# Altium PCB BMI088_CORE_V1.PcbDoc
Units mil, origin at the board's own origin, x right, y up, seen from the top; angles counter-clockwise.
Board outline 748.03 x 748.03 mil, 2 copper layers (Top Layer, Bottom Layer); 14 components, 18 nets, 67 pads, 34 vias.
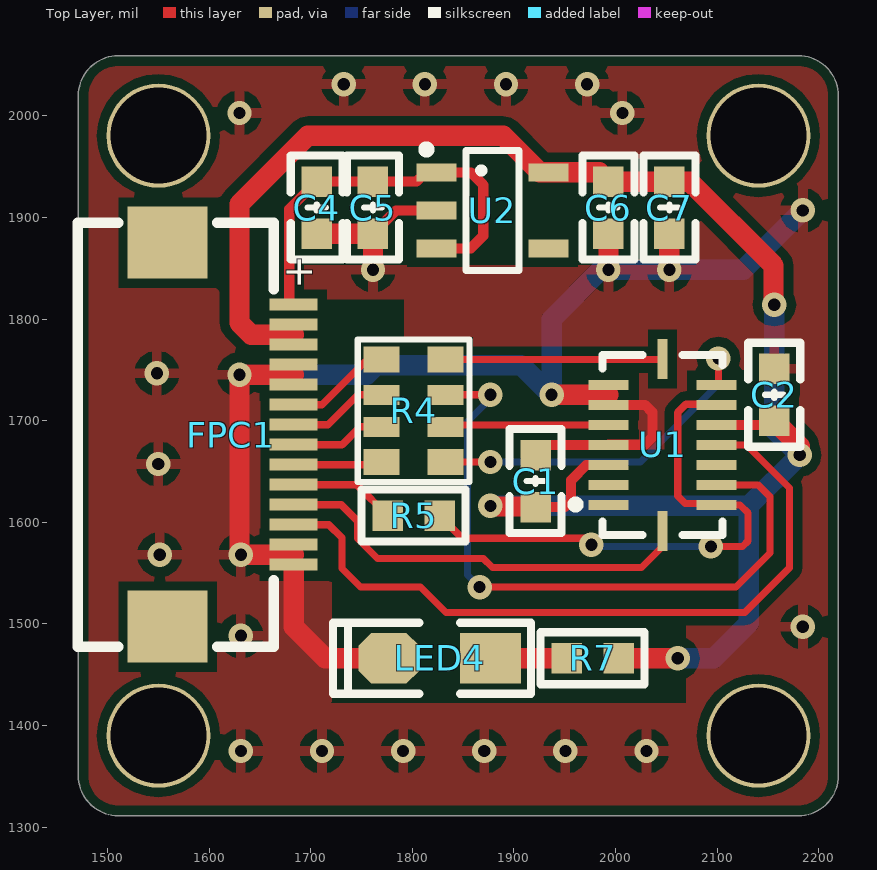
[diagram p0: Top Layer view]
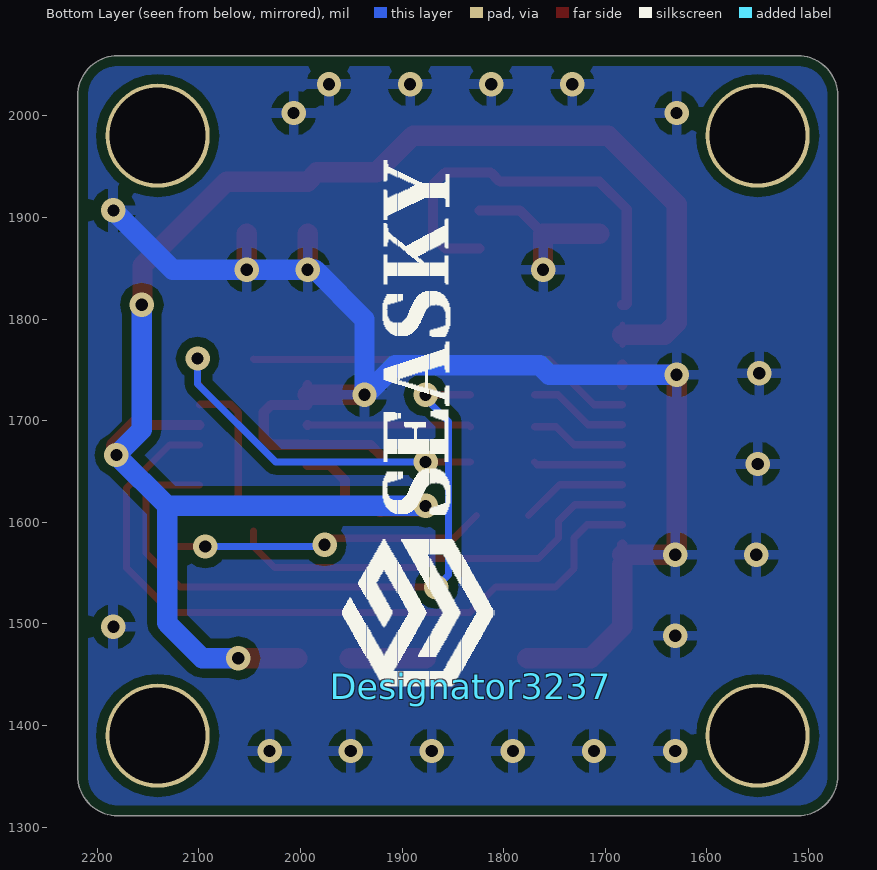
[diagram p1: Bottom Layer view, seen from below]
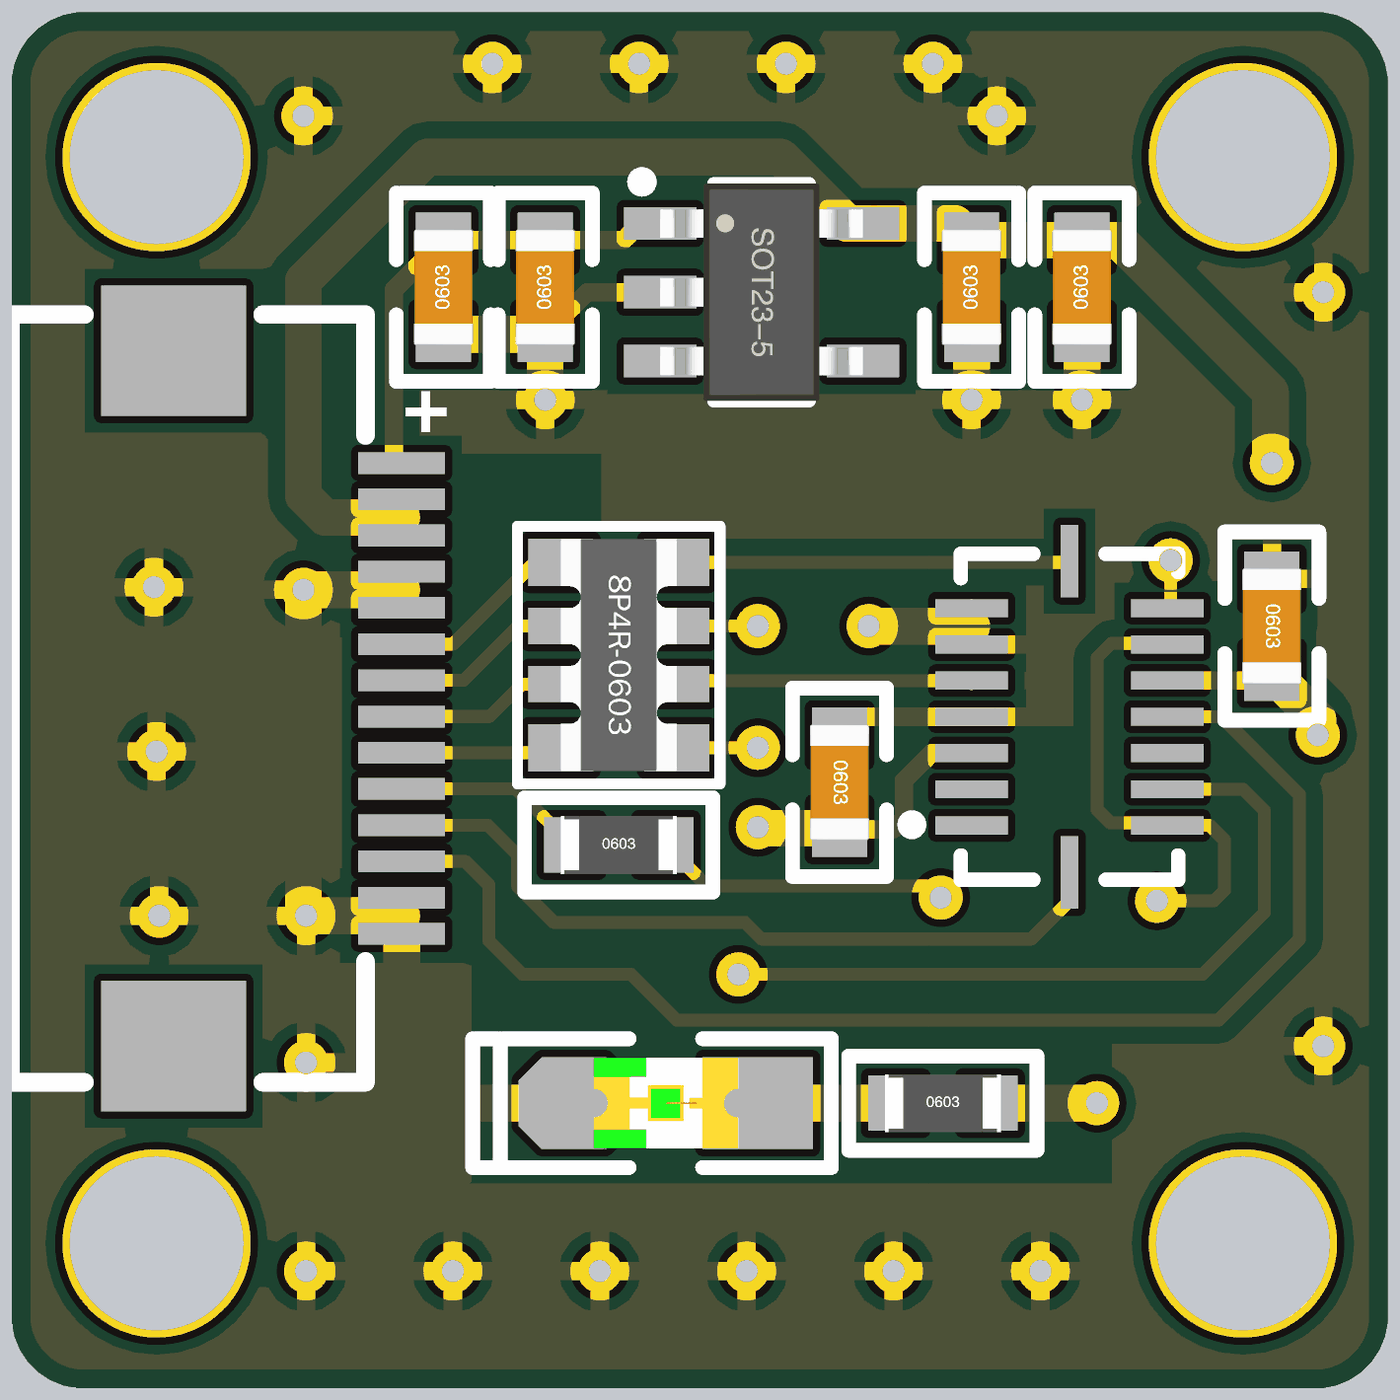
[diagram p2: 3D render of the assembled board from above, using the file's embedded part models]

## Layer stack, top to bottom
Top Solder: solder mask 0.4, Solder Resist, Dk 3.5
Top Layer: signal copper 1.4
Dielectric 1: dielectric 12.6, FR-4, Dk 4.8
Bottom Layer: signal copper 1.4
Bottom Solder: solder mask 0.4, Solder Resist, Dk 3.5

## Board outline
1471.26,1350.63 ccw(c1510.63,1350.63) 1510.63,1311.26 2179.92,1311.26 ccw(c2179.92,1350.63) 2219.29,1350.63 2219.29,2019.92 ccw(c2179.92,2019.92) 2179.92,2059.29 1510.63,2059.29 ccw(c1510.63,2019.92) 1471.26,2019.92

## Design rules (kind name [scope] priority, off if disabled: settings)
BoardOutlineClearance [All] p1: gap=10 ignorepadtopadclearanceinfootprint=FALSE except(0: Arc-SplitContinuation Track-SplitContinuation SMDPad-SplitContinuation THPad-SplitContinuation Via-SplitContinuation Fill-SplitContinuation Poly-SplitContinuation Region-SplitContinuation Text-SplitContinuation)
Clearance [All] p1: gap=7 ignorepadtopadclearanceinfootprint=FALSE except(0: Arc-Hole Track-Hole SMDPad-Hole THPad-Hole Via-Hole Fill-Hole Poly-Hole Region-Hole Text-Hole)
PolygonConnect [All] p1: connectstyle=Relief reliefconductorwidth=10 reliefentries=4 polygonreliefangle="90 Angle" airgapwidth=10
RoutingVias [All] p1: holewidth=28 width=50 viastyle="Through Hole" minholewidth=28 minwidth=50 maxholewidth=28 maxwidth=50
SolderMaskExpansion [All] p1: expansion=4
Width [All] p1: maxlimit=10 minlimit=10 preferedwidth=10
30 further rules are at their usual default settings.

## Components (designator, comment, footprint, x,y, rotation, side; value= is the part's Value field where it differs from the comment)
C1 "0.1uF" "C 0603_L" 1921.26,1640.67 r270 top
C2 "0.1uF" "C 0603_L" 2156.26,1725.59 r270 top
C4 "10uF" "C 0603_L" 1705.93,1909.79 r90 top
C5 "0.1uF" "C 0603_L" 1761.26,1909.79 r90 top
C6 "10uF" "C 0603_L" 1993.02,1909.79 r90 top
C7 "0.1uF" "C 0603_L" 2053.02,1909.79 r90 top
Designator3237 "Comment" SEASKY1 1832.57,1438.61 r90 bottom
FPC1 "FPC14" FPC-SMD_P0.50-14P_QCHF-SM-H2.0 1621.26,1686.26 r90 top
LED4 "红色" "LED 0805G" 1826.85,1466.26 r180 top
R4 "220R" RCA-8P4R-0603 1801.26,1709.85 r270 top
R5 "220R" "R 0603_L" 1801.26,1606.61 r0 top
R7 "10K" "R 0603_L" 1977.43,1466.26 r0 top
U1 "BMI088" BOSC-LGA-16-BMI088_V 2046.26,1676.26 r90 top
U2 "RT9013-33GB" SOT23-5L 1878.85,1907.06 r270 top

## Footprints (in the part's own frame and the unit in brackets; to place one, negate y for a bottom-side part, rotate by r counter-clockwise, add the part's x,y. Pads: shape width x height; smd on the part's side, far side on the other; paste and mask are expansions set on the pad)
BOSC-LGA-16-BMI088_V [mm] "LGA, 16-Leads, Body 3.0x4.5mm, Pitch 0.5mm"
  rect 0.25x1 smd: 1(-1.5,1.35) 2(-1,1.35) 3(-0.5,1.35) 4(0,1.35) 5(0.5,1.35) 6(1,1.35) 7(1.5,1.35) 9(1.5,-1.35) 10(1,-1.35) 11(0.5,-1.35) 12(0,-1.35) 13(-0.5,-1.35) 14(-1,-1.35) 15(-1.5,-1.35)
  rect 1x0.25 smd: 8(2.15,0) 16(-2.15,0)
  silkscreen extent -2.25,-1.5 2.25,2.28, body extent -2.25,-1.5 2.25,1.5, height 0.95
"C 0603_L" [mil] "无极性贴片电容                                       淘宝ID:黄晶宝石"
  rect 30x30 smd: 1(-25.59,0) 2(25.59,0)
  silkscreen extent -51,-26 51,26, body extent -31,-16 31,16, height 32
FPC-SMD_P0.50-14P_QCHF-SM-H2.0 [mm]
  rect 0.3x1.2 smd: 1(3.25,-1.575) 2(2.75,-1.575) 3(2.25,-1.575) 4(1.75,-1.575) 5(1.25,-1.575) 6(0.75,-1.575) 7(0.25,-1.575) 8(-0.25,-1.575) 9(-0.75,-1.575) 10(-1.25,-1.575) 11(-1.75,-1.575) 12(-2.25,-1.575) 13(-2.75,-1.575) 14(-3.25,-1.575)
  rect 1.8x2 smd: 15(4.8,1.575) 16(-4.8,1.575)
  silkscreen extent -5.3,-1.08 5.3,3.82
"LED 0805G" [mil] "绿色0805LED                              淘宝ID:黄晶宝石"
  rect 60x50 smd: 1(-50,0)
  oct 60x50 smd: 2(50,0)
  silkscreen extent -90,-35 105,35, body extent -39,-25 39,25, height 26
"R 0603_L" [mil] "1/10W贴片电阻                 淘宝ID:黄晶宝石"
  rect 30x30 smd: 1(-25.59,0) 2(25.59,0)
  silkscreen extent -51,-26 51,26, body extent -31,-16 32,16, height 16
RCA-8P4R-0603 [mm] "3.2mm*1.6mm*0.6mm(长*宽*厚)"
  rect 0.65x0.9 smd: 1(-1.28,-0.8) 4(1.28,-0.8) 5(1.28,0.8) 8(-1.28,0.8)
  rect 0.5x0.9 smd: 2(-0.4,-0.8) 3(0.4,-0.8) 6(0.4,0.8) 7(-0.4,0.8)
  silkscreen extent -1.78,-1.4 1.78,1.4, body extent -1.6,-0.8 1.6,0.8, height 0.6
SEASKY1 [mil]
  silkscreen extent 0,-23 518,126
SOT23-5L [mm] "3x1.6x1.1mm(长宽高) 封装库来自淘宝卖家 ID：黄晶宝石"
  rect 0.45x1 smd: 1(-0.95,-1.4) 2(0,-1.4) 3(0.95,-1.4) 4(0.95,1.4) 5(-0.95,1.4)
  silkscreen extent -1.6,-1.73 1.5,0.66, body extent -1.5,-1.4 1.5,1.4, height 1.15

## Part data
C1 C2 C4 C5 C6 C7: library part C, "贴片电容"
LED4: library part LED-SMD, "贴片LED"
R4: library part R-8P4R, "贴片排阻"
R5 R7: library part R, "贴片电阻"
U1: library part BOSC-BMI088-LGA-16, "6-axis Motion Tracking for High-performance Applications,", Manufacturer_Name=Bosch, Arrow Part Number=BMI088, Arrow Price/Stock=https://www.arrow.com/en/products/bmi088/bosch, Datasheet Link=https://ae-bst.resource.bosch.com/media/_tech/media/datasheets/BST-BMI088-DS001-13.pdf, Geometry.Height=1.45mm, Manufacturer_Part_Number=BMI088

## Free pads (board coordinates)
  round 102.36 hole 94.49: ""(1550,1390) ""(1550,1980.55) ""(2140.55,1390) ""(2140.55,1980.55)

## Via types
v1: diameter 24, hole 12, Top Layer to Bottom Layer, 34 vias

## Nets (pads, with @x,y where several pads share a name; then routed paths per layer and width w, separated by ;. In a path a pad name is that pad's centre, name@x,y a point inside that pad or via, vN(x,y) a via of type N, cw(c..) or ccw(c..) an arc to the next point about the centre after c; other vN are vias at no path point)
CSB_ACCEL: R4.7 U1.14 | length 660.5
  Top Layer w7: R4.7 v1(1876.85,1725.59) ; v1(1866.26,1536.26) 2118.5,1536.26 2152.2,1569.95 2152.2,1625.25 2140.55,1636.89 U1.14
  Bottom Layer w7: v1(1866.26,1536.26) 1854.35,1548.17 1854.35,1699.35 1876.85,1721.85 v1(1876.85,1725.59)
CSB_GYRO: R4.6 U1.5 | length 161.2
  Top Layer w7: R4.6 1834.53,1695.87 1834.6,1695.94 U1.5
  Top Layer w10: U1.5@1993.03,1695.87 U1.5
GND: C1.1 C2.1 C4.1 C5.1 C6.1 C7.1 FPC1.4 FPC1.5 FPC1.13 FPC1.14 LED4.2 U1.4 U1.6 U1.7 U2.2 | length 1681.8
  Top Layer w10: FPC1.14 1683.27,1568.15 FPC1.13 ; FPC1.5 1683.27,1745.31 FPC1.4 ; C5.1 1784.13,1907.06 U2.2 ; C1.1 1931.26,1676.26 U1.4 1993.19,1676.34 2028.87,1676.34 2036.26,1683.73 2036.26,1708.32 2028.95,1715.63 U1.6 1993.11,1725.47 U1.7
  Top Layer w20: FPC1.14 1683.27,1497.28 1714.29,1466.26 LED4.2 ; 1683.27,1568.15 v1(1631.26,1568.15) 1629.84,1569.57 v1(1629.84,1745.31) 1683.27,1745.31 ; C4.1 C5.1 v1(1761.26,1848.62) ; v1(1937.09,1725.59) 1937.21,1725.47 1993.11,1725.47 ; v1(1993.03,1848.62) C6.1 ; v1(2053.03,1848.62) C7.1
  Bottom Layer w20: v1(1629.84,1745.31) 1755.25,1745.31 1764.53,1754.59 1907.01,1754.59 1936.01,1725.59 v1(1937.09,1725.59) 1937.09,1800.04 1985.67,1848.62 v1(1993.03,1848.62) v1(2053.03,1848.62) 2125.74,1848.62 v1(2184.19,1907.06)
  other v1: 1631.26,1375.01 1711.1,1375.01 1790.94,1375.01 1870.77,1375.01 1950.61,1375.01 2030.45,1375.01 1631.26,1488.31 2184.19,1497.28 1551.42,1568.15 1550,1657.44 1548.58,1746.74 1629.84,2002.92 2006.77,2002.92 1732.49,2031.26 1812.32,2031.26 1892.16,2031.26 1972,2031.26
INT1_ACCEL: FPC1.11 U1.16 | length 422.5
  Top Layer w7: FPC1.11 1730.04,1617.36 1746.26,1601.14 1746.26,1584.16 1765.86,1564.56 1869.78,1564.56 1878.85,1555.49 2025.49,1555.49 2046.26,1576.26 U1.16
INT2_ACCEL: U1.1
INT3_GYRO: FPC1.12 U1.12 | length 727.8
  Top Layer w7: FPC1.12 1717.8,1597.68 1730.65,1584.83 1730.65,1554.57 1748.96,1536.26 1808.04,1536.26 1833.04,1511.26 2127.2,1511.26 2171.26,1555.32 2171.26,1633.97 2128.97,1676.26 U1.12
INT4_GYRO: U1.13
NetFPC1_6: FPC1.6 R4.1 | length 104.9
  Top Layer w7: FPC1.6 1711.12,1715.79 1755.57,1760.24 R4.1
NetFPC1_7: FPC1.7 R4.2 | length 98.7
  Top Layer w7: FPC1.7 1716.98,1696.1 1746.47,1725.59 R4.2
NetFPC1_8: FPC1.8 R4.3 | length 93.8
  Top Layer w7: FPC1.8 1730.97,1676.42 1748.64,1694.1 R4.3
NetFPC1_9: FPC1.9 R4.4 | length 87.6
  Top Layer w7: FPC1.9 1767.04,1656.73 R4.4
NetFPC1_10: FPC1.10 R5.1 | length 105
  Top Layer w7: FPC1.10 1745.23,1637.05 R5.1
NetLED4_1: LED4.1 R7.1 | length 75
  Top Layer w20: LED4.1 R7.1
SPI1_CLK: R4.8 U1.8 | length 213.8
  Top Layer w7: R4.8 2045.59,1760.24 U1.8
SPI1_MISO: R5.2 U1.10 U1.15 | length 546.2
  Top Layer w7: R5.2 1849.1,1584.36 1969.89,1584.36 v1(1976.26,1577.99) ; v1(2093.85,1576.26) 2124.92,1576.26 2130.55,1581.89 2130.55,1609.12 2122.46,1617.2 U1.15 2097.99,1618.63 2068.57,1618.63 2061.26,1625.94 2061.26,1708.32 2069.2,1716.26 2098.78,1716.26 U1.10
  Bottom Layer w7: v1(1976.26,1577.99) 1977.99,1576.26 v1(2093.85,1576.26)
SPI1_MOSI: R4.5 U1.9 | length 352.3
  Top Layer w7: R4.5 v1(1876.85,1659.45) ; U1.9 2099.84,1735.32 2101.26,1736.74 v1(2101.26,1761.26)
  Bottom Layer w7: v1(1876.85,1659.45) 2024.45,1659.45 2101.26,1736.26 v1(2101.26,1761.26)
VCC3V3: C1.2 C2.2 C6.2 C7.2 FPC1.2 FPC1.3 R7.2 U1.3 U1.11 U2.5 | length 1830.3
  Top Layer w6: FPC1.3 1683.27,1784.68 FPC1.2
  Top Layer w10: C1.2 1950.4,1615.08 1956.26,1620.94 1956.26,1641.62 1971.14,1656.5 1993.03,1656.5 U1.3 ; U1.11 2152.2,1695.94 C2.2
  Top Layer w20: 1683.27,1784.68 1641.55,1784.68 1629.84,1796.4 1629.84,1827.8 1629.84,1832.8 1629.84,1913.33 1697.06,1980.55 1889.34,1980.55 1925.42,1944.47 U2.5 1983.94,1944.47 C6.2 C7.2 2072.95,1935.38 2155.49,1852.83 2155.49,1814.98 v1(2156.26,1814.21) ; v1(1876.85,1616.26) 1877.44,1615.67 1920.67,1615.67 C1.2 ; R7.2 v1(2061.26,1466.26) ; C2.2 2181.26,1675 v1(2181.26,1666.26)
  Bottom Layer w20: v1(1876.85,1616.26) 2131.26,1616.26 ; v1(2061.26,1466.26) 2096.59,1466.26 2131.26,1500.93 2131.26,1616.26 ; v1(2156.26,1814.21) 2156.26,1691.26 v1(2181.26,1666.26) 2131.26,1616.26
VCCIN: C4.2 C5.2 FPC1.1 U2.1 U2.3 | length 410.2
  Top Layer w10: FPC1.1 1679.84,1814.21 1678.93,1815.12 1678.93,1908.38 C4.2 C5.2 1803.82,1935.38 1812.9,1944.47 U2.1 1857.47,1944.47 1869.78,1932.16 1869.78,1881.97 1857.47,1869.66 U2.3
pads on no net: FPC1.15 FPC1.16 U1.2 U2.4

## Polygon pours and split planes (outlines as drawn)
GND on Top Layer "Top Layer-GND" (solid, remove dead copper, pour order 0): 2201.26,2056.26 1501.26,2056.26 1476.26,2031.26 1476.26,1321.26 2211.26,1321.26 2211.26,2046.26
GND on Bottom Layer "Bottom Layer-GND" (solid, remove dead copper, pour order 2): 1471.26,2061.26 2221.26,2061.26 2221.26,1311.26 2216.26,1316.26 1471.26,1316.26

## Other copper
Top Layer:
  pour cut-out: 1745.05,1780.03 1857.47,1780.03 1849.1,1771.66 1849.1,1584.36 1746.46,1584.36 1746.26,1584.16
  pour cut-out: 1937.21,1671.26 1937.21,1572.99 2061.84,1572.99 2065.1,1576.26 2061.26,1580.1 2061.26,1671.26
  pour cut-out: 1871.26,1761.26 1871.29,1761.23 1871.29,1695.94 2006.69,1695.94 2006.85,1696.1 2003.02,1699.92 2003.02,1760.24
  pour cut-out: 1721.26,1548.11 1721.26,1423.55 1720.19,1422.48 2069.2,1422.48 2069.2,1547.4
  pour cut-out: 1697.56,1819.21 1714.29,1802.48 1714.29,1740.47 1791.67,1740.47 1791.67,1819.21
  pour cut-out: 1676.26,1961.26 1676.26,1864.42 1686.87,1853.8 2079.58,1853.8 2079.58,1952.82 2075.03,1957.38

## Silkscreen, mask and mechanical layers (free items; w line width, h text height)
Top Overlay:
  text "+" at 1711.1,1829.22 h50 r90
Mechanical 1:
  lines w10: 1510.63,2059.29 ccw(c1510.63,2019.92) 1471.26,2019.92 1471.26,1350.63 ccw(c1510.63,1350.63) 1510.63,1311.26 2179.92,1311.26 ccw(c2179.92,1350.63) 2219.29,1350.63 2219.29,2019.92 ccw(c2179.92,2019.92) 2179.92,2059.29 1510.63,2059.29 ; 1510.63,2059.29 1510.63,2059.29
Drill Drawing:
  the board outline again, w6